# Altium PCB HBridge.PcbDoc (part 2 of 4)
Units mil, origin at the board's own origin, x right, y up, seen from the top; angles counter-clockwise.
Board outline 2900.19 x 4650 mil, 2 copper layers (Top Layer, Bottom Layer), stack 33.512 mil thick; 136 components, 122 nets, 499 pads, 559 vias.
Unrouted connection lines stored in the file: 1.
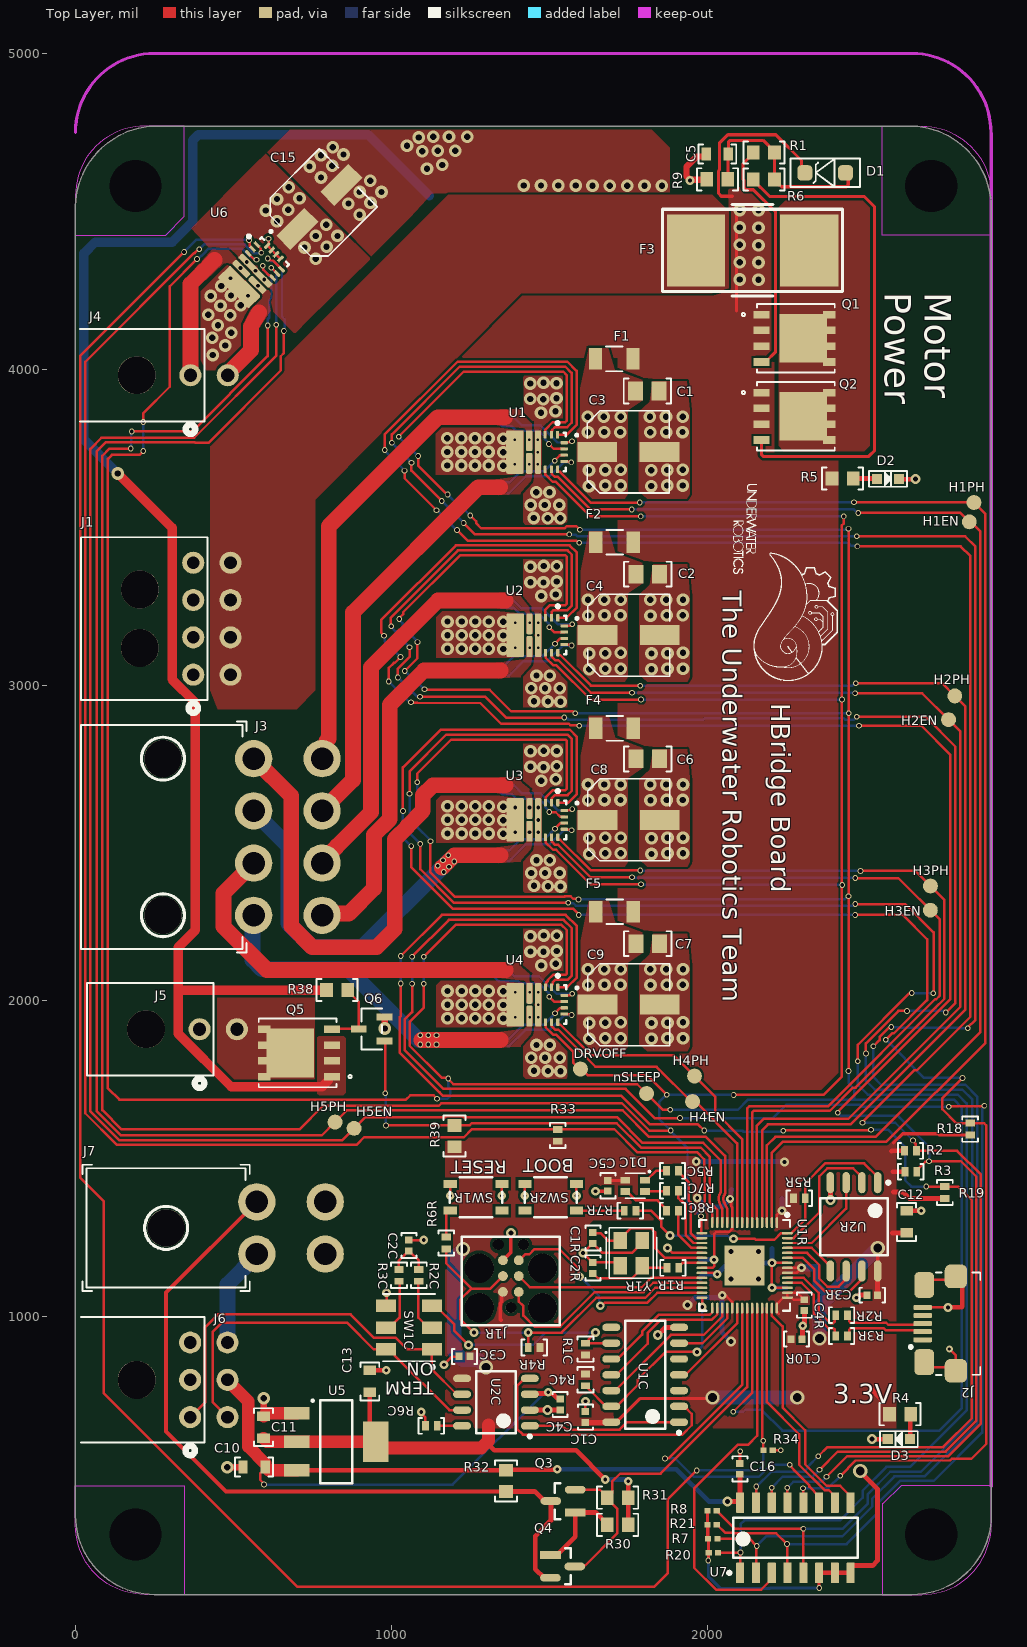
[diagram p0: Top Layer view]

## Via types
v1: diameter 40, hole 20, Top Layer to Bottom Layer, tented both sides, 289 vias
v2: diameter 18, hole 11.81, Top Layer to Bottom Layer, tented both sides, 171 vias
v3: diameter 27.56, hole 11.81, Top Layer to Bottom Layer, 32 vias
v4: diameter 19.68, hole 7.87, Top Layer to Bottom Layer, 21 vias
v5: diameter 19.68, hole 11.81, Top Layer to Bottom Layer, 14 vias
v6: diameter 27.56, hole 11.81, Top Layer to Bottom Layer, tented top, 9 vias
v7: diameter 45.28, hole 27.56, Top Layer to Bottom Layer, 7 vias
v8: diameter 31.5, hole 15.75, Top Layer to Bottom Layer, 7 vias
v9: diameter 31.5, hole 15.75, Top Layer to Bottom Layer, tented top, 6 vias
v10: diameter 26, hole 11.81, Top Layer to Bottom Layer, 1 vias
v11: diameter 22, hole 10, Top Layer to Bottom Layer, tented both sides, 1 vias
v12: diameter 28, hole 12, Top Layer to Bottom Layer, tented both sides, 1 vias

## Nets (pads, with @x,y where several pads share a name; then routed paths per layer and width w, separated by ;. In a path a pad name is that pad's centre, name@x,y a point inside that pad or via, vN(x,y) a via of type N, cw(c..) or ccw(c..) an arc to the next point about the centre after c; other vN are vias at no path point) (continued)
GND: (continued)
  other v1: 1823.85,1880 1874.85,1882 1923.85,1882 1823.85,1930 1874.85,1931 1923.85,1932 1355,1944 1178,1945 1223,1945 1266,1945 1309,1945 1355,1987 1178,1988 1223,1988 1266,1988 1309,1988 1355,2030 1178,2031 1223,2031 1266,2031 1309,2031 1820.85,2050 1871.85,2051 1922.85,2051 1819.85,2100 1870.85,2100 1923.85,2100 1823.85,2465 1874.85,2467 1923.85,2467 1823.85,2515 1874.85,2516 1923.85,2517 1355,2529 1178,2530 1223,2530 1266,2530 1309,2530 1355,2572 1178,2573 1223,2573 1266,2573 1309,2573 1355,2615 1178,2616 1223,2616 1266,2616 1309,2616 1820.85,2635 1871.85,2636 1922.85,2636 1819.85,2685 1870.85,2685 1923.85,2685 1823.85,3050 1874.85,3052 1923.85,3052 1823.85,3100 1874.85,3101 1923.85,3102 1355,3114 1178,3115 1223,3115 1266,3115 1309,3115 1355,3157 1178,3158 1223,3158 1266,3158 1309,3158 1355,3200 1178,3201 1223,3201 1266,3201 1309,3201 1820.85,3220 1871.85,3221 1922.85,3221 1819.85,3270 1870.85,3270 1923.85,3270 1823,3630 1874,3632 1923,3632 1823,3680 1874,3681 1923,3682 1354.15,3694 1177.15,3695 1222.15,3695 1265.15,3695 1308.15,3695 1354.15,3737 1177.15,3738 1222.15,3738 1265.15,3738 1308.15,3738 1354.15,3780 1177.15,3781 1222.15,3781 1265.15,3781 1308.15,3781 1820,3800 1871,3801 1922,3801 1819,3850 1870,3850 1923,3850 435,4045 474,4075 433,4100 493,4116 451.12,4139.73 489.67,4171.14 420,4173 459.27,4201.54 522.91,4202.96 428.86,4231.95 492.5,4233.36 462.1,4263.77 899.69,4489.23 864.33,4524.58 934.34,4526.7 899.69,4561.35 968.99,4561.35 1637,4581 1692,4581 1747,4581 1802,4581 1857,4581 1419,4582 1474,4582 1529,4582 1584,4582 933.63,4596.71 777.36,4607.32 1113,4635 741.3,4641.96 812.72,4644.08 1161,4647 777.36,4678.03 848.78,4680.15 1098,4690 1147,4692 1203,4692 814.84,4703.19 1050,4708 1087,4734 1133,4736 1183,4736 1241,4736
  other v4: 1392.48,1948.47 1392.48,2027.21 1392.49,3118.47 1392.49,3197.21 1391.64,3698.47 1391.64,3777.21
  other v5: 1392.49,2533.47 1392.49,2612.21 546.25,4232.63 490.58,4288.3
GND_RP2CAN: C1C.2 C1R.2 C2C.1 C2R.2 C3C.2 C3R.2 C4C.2 C4R.2 C5C.2 C5R.2 C6R.2 C7R.2 C8R.2 C9R.2 C10.2 C10R.2 C11.2 C11R.2 C12.2 C12R.2 C13.2 C13R.2 C16.1 D3.2 J1R.6 J2.5 J2.6 J2.7 J2.8 J2.9 J6.2 J7.3 J7.4 R6C.2 R7.1 R8.1 R20.1 R21.1 R34.1 SW1C.6 SW1R.B1 SW1R.B2 SW2R.B1 SW2R.B2 U1C.7 U1R.19 U1R.57 U2C.2 U2R.4 U5.1 U7.6 U7.7 U7.8 Y1R.2 Y1R.4 | length 3453.1
  Top Layer w7.87: SW1C.6@983.03,1034.41 985,1036.38 v6(985,1075.75) ; C2C.1@1055.87,1242.48 v3(1103.11,1242.48) ; v3(1095.24,697.8) 1095.24,693.66 1108.03,680.87 R6C.2@1108.03,654.29 ; v3(1166.72,848.02) 1192.41,873.71 1214.3,873.71 C3C.2@1214.76,874.17 ; v3(1186.77,1382.83) SW1R.B2@1186.77,1420.24 ; v3(1350.16,1382.83) 1350.16,1416.38 SW1R.B1@1350.28,1416.5 ; v3(1422.99,1382.83) SW2R.B2@1422.99,1420.24 ; v3(1586.38,1382.83) SW2R.B1@1586.38,1420.24 ; v6(1874.76,1217.48) 1890.51,1201.73 U1R.19@1983.52,1201.73 ; U1R.57@2071.61,1201.73 v8(2075.55,1205.67) ; R34.1@2207.76,577 v2@2233,577 ; J2.5@2682.68,1029.18 2682.78,1029.09 2762.91,1029.09 v3(2763,1029) ; J2.6@2687.61,855.95 2704.34,839.22 2777.17,839.22 J2.9@2788,828.39 2788,877 v11(2767,898) ; J2.7@2687.61,1100.05 2704.34,1116.78 2797.27,1116.78 J2.8@2797.79,1116.26
  Top Layer w8: SW1R.B1@1347.6,1419.17 SW1R.B1@1350.28,1416.5 ; v3(1607.05,1201.73) v3@1607.64,1201.73 ; C1C.2@1614.92,697.05 C1C.2@1614.92,699.17 v3(1614.92,732.05) ; Y1R.2@1725.16,1161.1 1714.65,1171.61 C2R.2@1638.54,1171.61 1637.76,1171.61 v3@1607.64,1201.73 ; Y1R.4@1795.16,1241.1 1795.16,1235.2 1761.63,1201.67 1669.51,1201.67 1639.33,1231.85 C1R.2@1638.54,1231.85 1637.76,1231.85 v3@1607.64,1201.73
  Top Layer w9.84: v3(1646.42,1397.2) C5C.2@1685.79,1397.2
  Top Layer w10: R8.1@2001.24,385 R21.1@2001.24,341 2002.24,340 2002.24,298 R7.1@2003.24,297 2004.24,296 2004.24,254 R20.1@2005.24,253 2004.66,252.43 2004.66,228.48 v2(2004.09,227.91) ; C16.1@2104,535.25 2104.5,535.75 2104.5,573.5 v2(2105,574) ; U7.6@2354.81,188.78 2354.91,188.69 2354.91,141.09 v2(2355,141)
  Top Layer w11.81: J1R.6@1353.7,1178.5 1378.62,1203.42 v8(1378.62,1265.05)
  Top Layer w15: C13.2@932,830 v3(984,830) ; U7.6@2354.81,188.78 U7.7@2404.81,188.78 U7.8@2454.81,188.78 2454.81,206.55 2460.11,211.84 2524.47,211.84 2539.63,227 2539.63,454.37 2485,509 v7(2485,511) ; v9(2522,612) D3.2@2572,612 ; C12.2@2632,1335 v3(2678,1335) ; v3@2763,1029.81 2805.81,1029.81 2808,1032 2808,1098.74 J2.8@2794.87,1111.87
  Top Layer w15.75: U2C.2@1438.74,704.29 1438.89,704.15 1494.85,704.15 v8(1495,704) 1495.29,704.29 C4C.2@1528.31,704.29 ; v8(1843.8,941.36) 1868.34,965.91 U1C.7@1911.18,965.91 ; C10R.2@2296.98,932.15 C10R.2@2300.13,929 2301.52,930.39 2301.52,969.61 v3(2302.91,971) 2302.91,974.2 2307.83,979.12 C4R.2@2307.83,1019.25 ; v9(2390.32,1368.96) U2R.4@2390.32,1424.23 ; v3(2473.19,1060) 2481.06,1067.87 C3R.2@2506.06,1067.87
  Top Layer w20: v1(481,523) 481.5,523.5 529.99,523.5 C10.2@530.49,524 ; C11.2@595.49,685 595.75,685.25 595.75,741.75 v1(596,742)
  Top Layer w40: C11.2@595.75,685.25 605.04,694.55 U5.1@701,694.55
  Bottom Layer w10: v2(2004.09,227.91) 2004.09,177.91 2043.09,138.91 2196.92,138.91 2199.01,141 v2(2355,141)
  other v2: 2232.88,577.12
  other v8: 2075.55,1119.06 2162.17,1119.06 2162.17,1205.67
HBRIDGE1_EN: H1EN.TP U1.9 U1R.3 | length 4101.7
  Top Layer w7.87: U1.9@1506.8,3682.72 1507.78,3681.74 1507.78,3669.14 1517.82,3659.1 1527.83,3659.1 1630.93,3556 v2(1761.15,3556) ; U1R.3@2189.72,1297.7 2189.72,1542.72 2216.16,1569.16 2533.41,1569.16 2865.25,1901 2865.25,3486 2832.35,3518.9 2828.16,3518.9 2802.06,3545 v2(2479,3545)
  Bottom Layer w7.87: v2(1761.15,3556) 1761.65,3556.5 2464.76,3556.5 2476.26,3545 v2(2479,3545)
HBRIDGE1_IPROPI: R7.2 U1.2 U7.2 | length 7386.1
  Top Layer w7.87: v2(1002,3767) 1002,3793.73 1216.27,4008 1551.4,4008 1571.15,3988.25 1571.15,3830.42 1557.31,3816.58 1517.82,3816.58 1509.75,3808.51 1509.75,3805.92 1507.78,3803.96 1507.78,3793.94 U1.2@1506.8,3792.96 ; v2(1064,3704) 1064,3679 v2(1160,3583) ; v2(1229.07,3513.12) 1265.2,3477 v2(1564,3477) ; R7.2@2032.76,297 2134,297 v2(2157,274) 2155.91,272.91 2155.91,189.87 U7.2@2154.81,188.78 ; v2(2473.96,3471.22) 2817.29,3471.22 2849.5,3439 2849.5,1939.5 2825.03,1915.03 v2(2825.03,1912.97) ; v2(2526.65,1856.35) 2546.16,1875.86 2546.16,1885.22 2576.03,1915.09 2581.03,1915.09 v2(2582.97,1917.03)
  Bottom Layer w7.87: v2(1002,3767) 1064,3705 v2(1064,3704) ; v2(1160,3583) 1160.5,3583 1229.07,3514.43 v2(1229.07,3513.12) ; v2(1564,3477) 1565.85,3475.15 1584.81,3475.15 1588.75,3471.22 v2(2473.96,3471.22) ; v2(2157,274) 2187,304 2428,304 2523.17,399.17 2523.17,424.1 2593.08,494 2689,494 2856,661 2856,1696 2817.76,1734.24 2550.73,1734.24 2526.65,1758.33 v2(2526.65,1856.35) ; v2(2582.97,1917.03) 2605.69,1917.03 2607.72,1915 2800.28,1915 2802.31,1912.97 v2(2825.03,1912.97)